# Altium PCB MAGI'sDIPBoard.PcbDoc
Units mm, origin at the board's own origin, x right, y up, seen from the top; angles counter-clockwise.
Board outline 152.4 x 101.6 mm, 2 copper layers (Top Layer, Bottom Layer); 2 components, 25 nets, 56 pads, 7 vias.
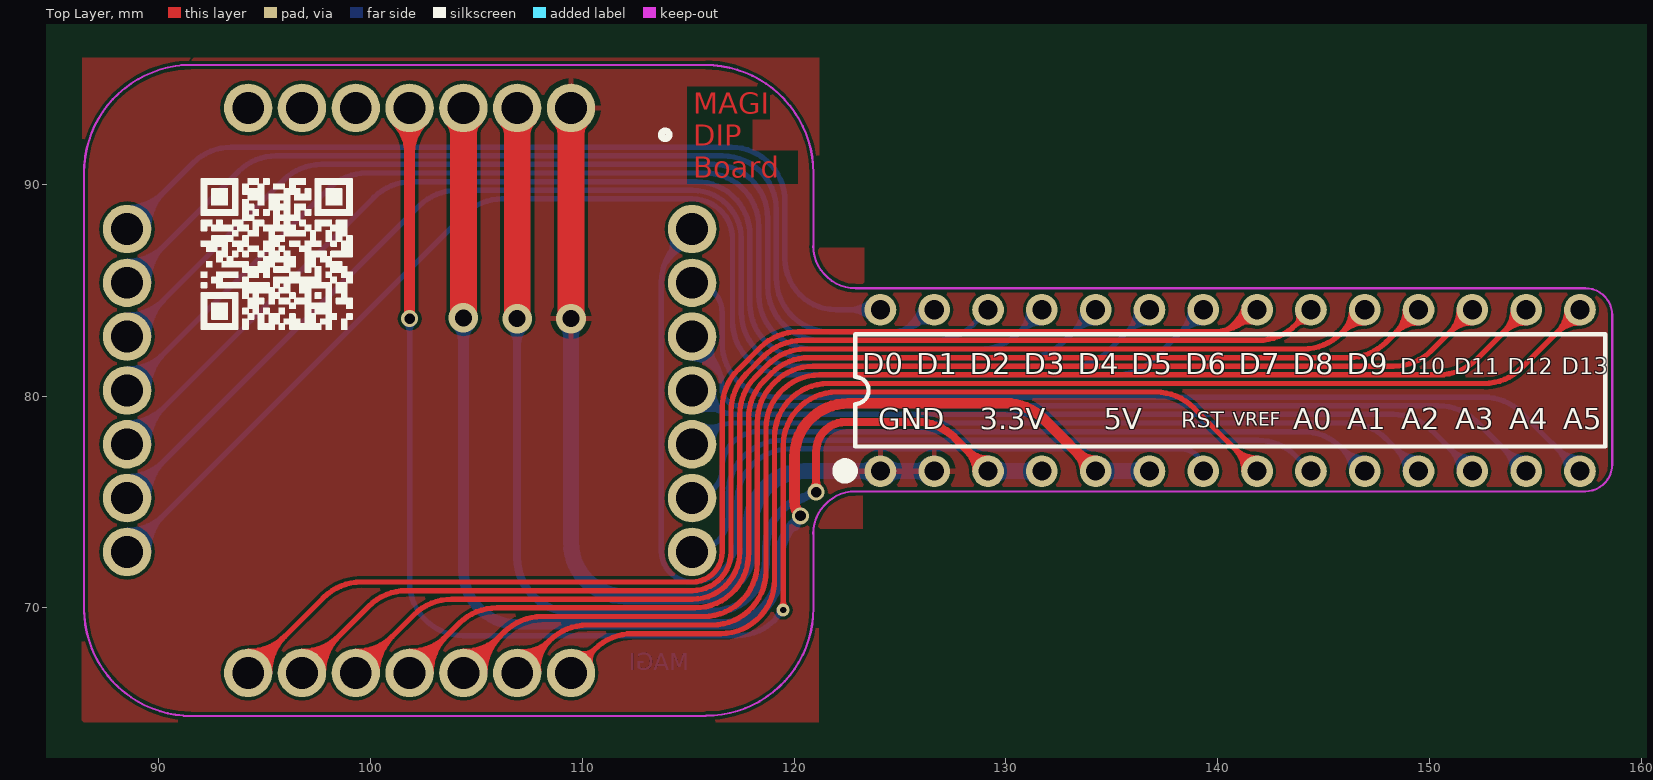
[diagram p0: Top Layer view]
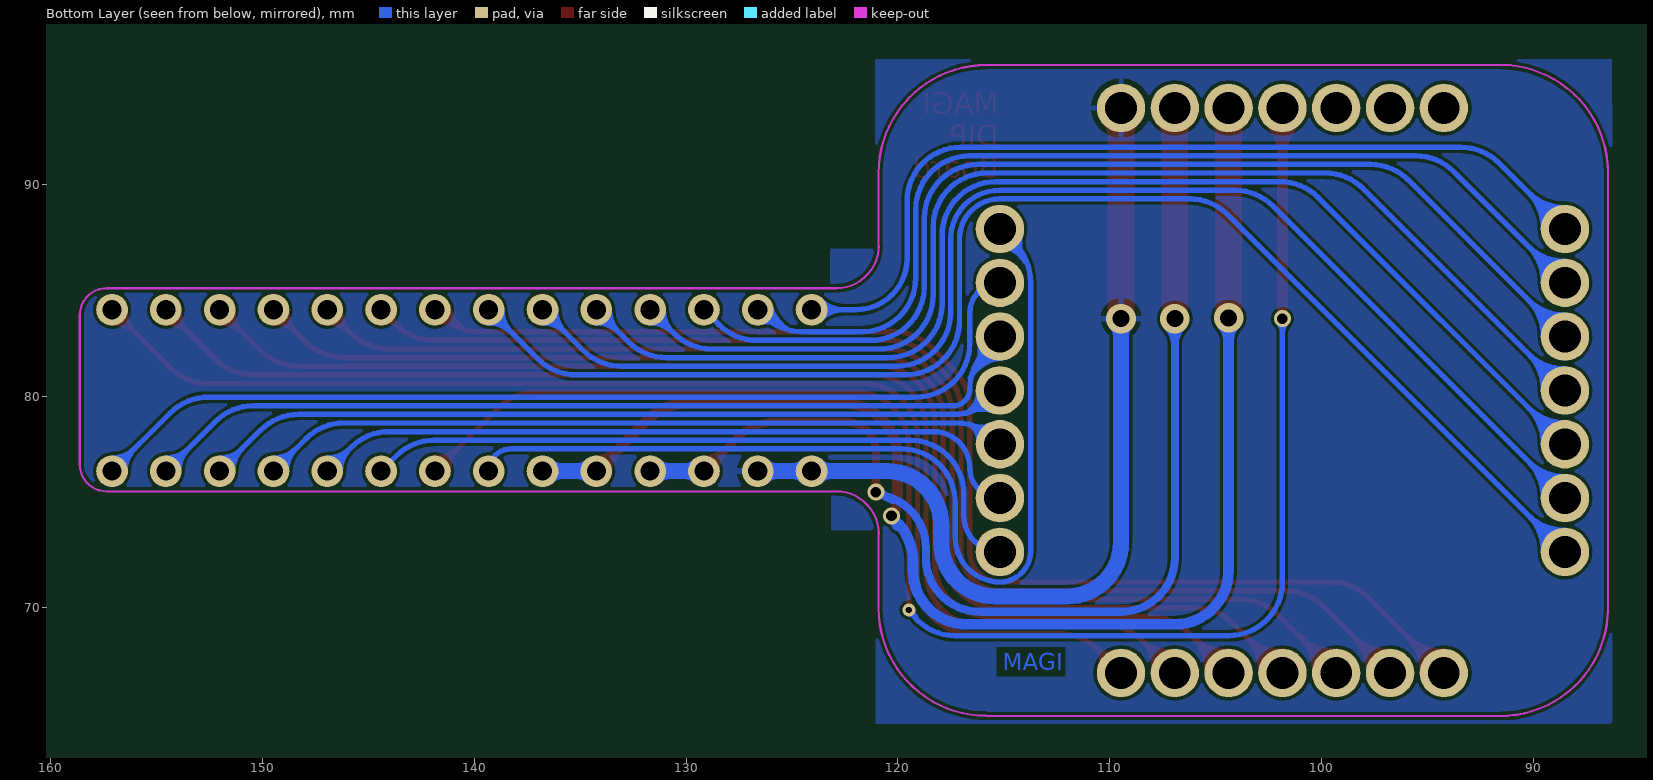
[diagram p1: Bottom Layer view, seen from below]

## Layer stack, top to bottom
Top Layer: signal copper 0.0356
Dielectric: dielectric 0.32, FR-4, Dk 4.8
Bottom Layer: signal copper 0.0356

## Board outline
25.4,25.4 177.8,25.4 177.8,127 25.4,127

## Design rules (kind name [scope] priority, off if disabled: settings)
Clearance [All] p1: gap=0.152
ComponentClearance [All] p1: gap=0 collisioncheckmode=3 verticalgap=0 showdistances=FALSE
PolygonConnect [All] p1: connectstyle=Relief reliefconductorwidth=0.254 reliefentries=4 polygonreliefangle="90 Angle" airgapwidth=0.254
RoutingVias [All] p1: holewidth=0.711 width=1.27 viastyle="Through Hole" minholewidth=0.305 minwidth=0.61 maxholewidth=25.4 maxwidth=127
SilkToSilkClearance [All] p1: silktosilkclearance=0
SolderMaskExpansion [All] p1: expansion=0.102
Width [All] p1: maxlimit=2.54 minlimit=0.152 preferedwidth=0.762
26 further rules are at their usual default settings.

## Classes and differential pairs
component class MAGI'sDIPBoard: ""

## Components (designator, comment, footprint, x,y, rotation, side; value= is the part's Value field where it differs from the comment)
J1 "MAGI-M8" MAGI-M8 101.854,80.264 r0 top
J2 "CON28" 28P3 140.589,80.264 r90 top

## Footprints (in the part's own frame and the unit in brackets; to place one, negate y for a bottom-side part, rotate by r counter-clockwise, add the part's x,y. Pads: shape width x height; smd on the part's side, far side on the other; paste and mask are expansions set on the pad)
28P3 [mm] "DIP, 28-Leads, Row Spacing 7.62mm, Pitch 2.54mm, Body 34.67x7.3mm"
  round 1.5 hole 0.9: 1(-3.81,16.51) 2(-3.81,13.97) 3(-3.81,11.43) 4(-3.81,8.89) 5(-3.81,6.35) 6(-3.81,3.81) 7(-3.81,1.27) 8(-3.81,-1.27) 9(-3.81,-3.81) 10(-3.81,-6.35) 11(-3.81,-8.89) 12(-3.81,-11.43) 13(-3.81,-13.97) 14(-3.81,-16.51) 15(3.81,-16.51) 16(3.81,-13.97) 17(3.81,-11.43) 18(3.81,-8.89) 19(3.81,-6.35) 20(3.81,-3.81) 21(3.81,-1.27) 22(3.81,1.27) 23(3.81,3.81) 24(3.81,6.35) 25(3.81,8.89) 26(3.81,11.43) 27(3.81,13.97) 28(3.81,16.51)
  silkscreen extent -4.1,-17.7 2.65,18.48, body extent -3.6,-17.65 3.6,17.65, height 4.58
MAGI-M8 [mil]
  round 90 hole 59.06: 1(300,525) 2(200,525) 3(100,525) 4(0,525) 5(-100,525) 6(-200,525) 7(-300,525) 8(-525,300) 9(-525,200) 10(-525,100) 11(-525,0) 12(-525,-100) 13(-525,-200) 14(-525,-300) 15(-300,-525) 16(-200,-525) 17(-100,-525) 18(0,-525) 19(100,-525) 20(200,-525) 21(300,-525) 22(525,-300) 23(525,-200) 24(525,-100) 25(525,0) 26(525,100) 27(525,200) 28(525,300)
  Keep-Out Layer lines w3.94: -605,-415 -605,290 -605,420 ; -605,-405 ccw(c-405,-405) -405,-605 ; -605,405 cw(c-405,405) -405,605 ; -425,605 425,605 ; -410,-605 415,-605
  silkscreen extent 468,468 482,482

## Part data
J2: "Connector"

## Via types
v1: diameter 0.8, hole 0.5, Top Layer to Bottom Layer, 3 vias
v2: diameter 1.4, hole 0.8, Top Layer to Bottom Layer, 3 vias
v3: diameter 0.61, hole 0.305, Top Layer to Bottom Layer, 1 vias

## Nets (pads, with @x,y where several pads share a name; then routed paths per layer and width w, separated by ;. In a path a pad name is that pad's centre, name@x,y a point inside that pad or via, vN(x,y) a via of type N, cw(c..) or ccw(c..) an arc to the next point about the centre after c; other vN are vias at no path point)
3.3V: J1.2 J2.3 J2.4 | length 64.9
  Top Layer w0.381: v1@120.896,75.612 ccw(c120.538,75.969) 121.044,75.969 ccw(c121.549,75.969) v1@121.192,75.612 ; v1(121.044,75.463) 121.044,77.381 cw(c122.441,77.381) 122.441,78.778 125.783,78.778 cw(c125.783,76.238) 127.579,78.034 J2.3 ; J2.3@128.6,76.454 ccw(c127.249,76.454) 128.204,77.409 ccw(c129.159,78.364) J2.3@129.159,77.013
  Top Layer w1.27: J1.2@106.575,93.24 cw(c105.708,92.373) 106.934,92.373 cw(c108.16,92.373) J1.2@107.293,93.24 ; v2(106.934,83.655) J1.2
  Bottom Layer w0.381: v2@106.574,83.295 cw(c105.704,82.425) 106.934,82.425 cw(c108.164,82.425) v2@107.294,83.295 ; v2(106.934,83.655) 106.934,72.359 ccw(c109.474,72.359) 109.474,69.819 116.141,69.819 ccw(c116.141,72.359) 118.681,72.359 118.681,72.821 cw(c121.221,72.821) v1@121.221,75.361 ; 120.255,75.102 ccw(c119.996,76.068) v1@120.862,75.568
  Bottom Layer w0.762: J2.3 J2.4 ; J2.3@129.42,76.193 cw(c130.05,75.563) 130.05,76.454 cw(c130.05,77.345) J2.3@129.42,76.715 ; J2.4@131.438,76.193 ccw(c130.808,75.563) 130.808,76.454 ccw(c130.808,77.345) J2.4@131.438,76.715
5V: J1.3 J2.5 J2.6 | length 73.6
  Top Layer w0.508: v1(120.307,74.346) cw(c120.997,75.035) 120.021,75.035 120.021,77.114 cw(c122.561,77.114) 122.561,79.654 129.986,79.654 cw(c129.986,77.114) 131.783,78.91 J2.5 ; J2.5@133.743,76.454 ccw(c132.546,76.454) 133.392,77.301 ccw(c134.239,78.147) J2.5@134.239,76.95
  Top Layer w1.27: J1.3@104.035,93.24 cw(c103.168,92.373) 104.394,92.373 cw(c105.62,92.373) J1.3@104.753,93.24 ; v2(104.394,83.693) J1.3
  Bottom Layer w0.508: v2@104.079,83.378 cw(c103.317,82.616) 104.394,82.616 cw(c105.471,82.616) v2@104.709,83.378 ; v2(104.394,83.693) 104.394,71.762 ccw(c106.934,71.762) 106.934,69.222 116.754,69.222 ccw(c116.754,71.762) 119.294,71.762 119.294,72.224 cw(c121.834,72.224) v1@120.377,74.305 ; 120.018,73.877 ccw(c119.54,74.279) v1@120.162,74.333
  Bottom Layer w0.762: J2.5 J2.6 ; J2.5@134.5,76.193 cw(c135.13,75.563) 135.13,76.454 cw(c135.13,77.345) J2.5@134.5,76.715 ; J2.6@136.518,76.193 ccw(c135.888,75.563) 135.888,76.454 ccw(c135.888,77.345) J2.6@136.518,76.715
A0: J1.22 J2.9 | length 33.2
  Bottom Layer w0.254: J1.22 ccw(c115.189,74.346) 116.891,74.346 116.891,75.374 cw(c119.431,75.374) 119.431,77.915 141.886,77.915 cw(c141.886,75.374) 143.682,77.171 J2.9
A1: J1.23 J2.10 | length 38
  Bottom Layer w0.254: J1.23 ccw(c115.189,76.606) 116.611,76.606 cw(c118.326,76.606) 118.326,78.321 144.02,78.321 cw(c144.02,75.781) 145.816,77.577 J2.10 ; J2.10@146.316,76.454 ccw(c144.812,76.454) 145.875,77.518 ccw(c146.939,78.581) J2.10@146.939,77.077 ; J2.10@146.57,76.454 ccw(c145.679,76.454) 146.309,77.084 ccw(c146.939,77.714) J2.10@146.939,76.823
A2: J1.24 J2.11 | length 42.8
  Bottom Layer w0.254: J1.24 115.448,77.983 cw(c117.244,76.187) 117.244,78.727 146.154,78.727 cw(c146.154,76.187) 147.95,77.983 J2.11 ; J1.24@115.526,78.408 ccw(c115.853,79.071) 116.223,78.43 ; J1.24@115.638,78.635 ccw(c116.106,79.584) 116.634,78.668 ccw(c117.073,77.909) J1.24@116.2,77.823 ; J1.24@115.947,77.798 cw(c116.642,77.866) 116.293,78.471 ; J2.11@148.856,76.454 ccw(c147.352,76.454) 148.415,77.518 ccw(c149.479,78.581) J2.11@149.479,77.077 ; J2.11@149.11,76.454 ccw(c148.219,76.454) 148.849,77.084 ccw(c149.479,77.714) J2.11@149.479,76.823
A3: J1.25 J2.12 | length 46.4
  Bottom Layer w0.254: J1.25 115.575,79.878 ccw(c117.371,81.674) 117.371,79.134 148.287,79.134 cw(c148.287,76.594) 150.083,78.39 J2.12 ; J1.25@115.436,79.543 cw(c115.776,78.549) 116.301,79.459 ; J1.25@115.518,79.303 cw(c116.016,77.848) 116.785,79.179 cw(c117.366,80.186) J1.25@116.204,80.228 ; J1.25@115.951,80.237 ccw(c116.888,80.203) 116.419,79.391 ; J2.12@151.396,76.454 ccw(c149.892,76.454) 150.955,77.518 ccw(c152.019,78.581) J2.12@152.019,77.077 ; J2.12@151.65,76.454 ccw(c150.759,76.454) 151.389,77.084 ccw(c152.019,77.714) J2.12@152.019,76.823
A4: J1.26 J2.13 | length 52.8
  Bottom Layer w0.254: J1.26@115.116,81.791 cw(c114.981,79.93) 116.596,80.863 ; J1.26@115.134,82.044 cw(c115.023,80.508) 116.357,81.278 ; J1.26@115.152,82.297 cw(c115.065,81.085) 116.117,81.693 ; J1.26 115.867,82.126 cw(c114.071,80.329) 116.611,80.329 ccw(c117.401,80.329) 117.401,79.54 150.421,79.54 cw(c150.421,77) 152.217,78.796 J2.13 ; J1.26@115.925,82.607 ccw(c116.883,82.35) 116.024,81.854 ; J1.26@116.17,82.541 ccw(c117.721,82.126) 116.331,81.323 ; J2.13@153.936,76.454 ccw(c152.432,76.454) 153.495,77.518 ccw(c154.559,78.581) J2.13@154.559,77.077 ; J2.13@154.19,76.454 ccw(c153.299,76.454) 153.929,77.084 ccw(c154.559,77.714) J2.13@154.559,76.823
A5: J1.27 J2.14 | length 50.7
  Bottom Layer w0.254: J1.27 cw(c115.189,83.922) 116.611,83.922 116.611,82.486 ccw(c119.151,82.486) 119.151,79.947 152.554,79.947 cw(c152.554,77.406) 154.35,79.203 J2.14 ; J2.14@156.476,76.454 ccw(c154.972,76.454) 156.035,77.518 ccw(c157.099,78.581) J2.14@157.099,77.077 ; J2.14@156.73,76.454 ccw(c155.839,76.454) 156.469,77.084 ccw(c157.099,77.714) J2.14@157.099,76.823
D0: J1.8 J2.28 | length 55
  Bottom Layer w0.254: J1.8 91.636,91.001 cw(c93.432,89.205) 93.432,91.745 117.03,91.745 cw(c117.03,89.205) 119.57,89.205 119.57,86.487 ccw(c121.983,86.487) 121.983,84.074 J2.28 ; J1.8@88.519,88.392 ccw(c88.519,89.618) 89.386,88.751 ccw(c90.253,87.884) J1.8@89.027,87.884 ; J1.8@88.519,88.646 ccw(c88.519,90.486) 89.82,89.185 ccw(c91.121,87.884) J1.8@89.281,87.884 ; J1.8@88.519,88.9 ccw(c88.519,91.353) 90.253,89.618 ccw(c91.988,87.884) J1.8@89.535,87.884 ; J2.28@123.638,83.633 ccw(c122.575,82.57) 122.575,84.074 ccw(c122.575,85.578) J2.28@123.638,84.515 ; J2.28@123.818,83.813 ccw(c123.188,83.183) 123.188,84.074 ccw(c123.188,84.965) J2.28@123.818,84.335
D1: J1.9 J2.27 | length 58.9
  Bottom Layer w0.254: J1.9 93.769,90.594 cw(c95.566,88.798) 95.566,91.338 116.624,91.338 cw(c116.624,88.798) 119.164,88.798 119.164,85.573 ccw(c121.704,85.573) 121.704,83.033 124.525,83.033 ccw(c124.525,85.573) 126.322,83.777 J2.27 ; J1.9@88.519,85.852 ccw(c88.519,87.078) 89.386,86.211 ccw(c90.253,85.344) J1.9@89.027,85.344 ; J1.9@88.519,86.106 ccw(c88.519,87.946) 89.82,86.645 ccw(c91.121,85.344) J1.9@89.281,85.344 ; J1.9@88.519,86.36 ccw(c88.519,88.813) 90.253,87.078 ccw(c91.988,85.344) J1.9@89.535,85.344 ; 125.143,83.096 ccw(c124.205,84.721) J2.27@126.017,84.235 ; 125.599,83.359 cw(c126.165,82.378) J2.27@126.458,83.472 ; 125.674,83.403 ccw(c125.043,84.496) J2.27@126.263,84.17
D2: J1.10 J2.26 | length 59.2
  Bottom Layer w0.254: J1.10 95.903,90.188 cw(c97.699,88.392) 97.699,90.932 116.218,90.932 cw(c116.218,88.392) 118.758,88.392 118.758,85.166 ccw(c121.298,85.166) 121.298,82.626 126.659,82.626 ccw(c126.659,85.166) 128.455,83.37 J2.26 ; J1.10@88.519,83.312 ccw(c88.519,84.538) 89.386,83.671 ccw(c90.253,82.804) J1.10@89.027,82.804 ; J1.10@88.519,83.566 ccw(c88.519,85.406) 89.82,84.105 ccw(c91.121,82.804) J1.10@89.281,82.804 ; J1.10@88.519,83.82 ccw(c88.519,86.273) 90.253,84.538 ccw(c91.988,82.804) J1.10@89.535,82.804
D3: J1.11 J2.25 | length 66.5
  Bottom Layer w0.254: J1.11 98.037,89.782 cw(c99.833,87.986) 99.833,90.526 115.799,90.526 cw(c115.799,87.986) 118.339,87.986 118.339,84.76 ccw(c120.879,84.76) 120.879,82.22 128.793,82.22 ccw(c128.793,84.76) 130.589,82.964 J2.25 ; J1.11@88.519,80.772 ccw(c88.519,81.998) 89.386,81.131 ccw(c90.253,80.264) J1.11@89.027,80.264 ; J1.11@88.519,81.026 ccw(c88.519,82.866) 89.82,81.565 ccw(c91.121,80.264) J1.11@89.281,80.264 ; J1.11@88.519,81.28 ccw(c88.519,83.733) 90.253,81.998 ccw(c91.988,80.264) J1.11@89.535,80.264 ; J2.25@131.076,84.074 cw(c129.572,84.074) 130.635,83.01 cw(c131.699,81.947) J2.25@131.699,83.451 ; J2.25@131.33,84.074 cw(c130.439,84.074) 131.069,83.444 cw(c131.699,82.814) J2.25@131.699,83.705
D4: J1.12 J2.24 | length 70.1
  Bottom Layer w0.254: J1.12 100.17,89.375 cw(c101.966,87.579) 101.966,90.119 115.379,90.119 cw(c115.379,87.579) 117.919,87.579 117.919,84.353 ccw(c120.459,84.353) 120.459,81.813 130.926,81.813 ccw(c130.926,84.353) 132.722,82.557 J2.24 ; J1.12@88.519,78.232 ccw(c88.519,79.458) 89.386,78.591 ccw(c90.253,77.724) J1.12@89.027,77.724 ; J1.12@88.519,78.486 ccw(c88.519,80.326) 89.82,79.025 ccw(c91.121,77.724) J1.12@89.281,77.724 ; J1.12@88.519,78.74 ccw(c88.519,81.193) 90.253,79.458 ccw(c91.988,77.724) J1.12@89.535,77.724 ; J2.24@133.616,84.074 cw(c132.112,84.074) 133.175,83.01 cw(c134.239,81.947) J2.24@134.239,83.451 ; J2.24@133.87,84.074 cw(c132.979,84.074) 133.609,83.444 cw(c134.239,82.814) J2.24@134.239,83.705
D5: J1.13 J2.23 | length 73.8
  Bottom Layer w0.254: J1.13 102.304,88.969 cw(c104.1,87.173) 104.1,89.713 115.21,89.713 cw(c115.21,87.409) 117.513,87.409 117.513,83.947 ccw(c120.053,83.947) 120.053,81.407 133.06,81.407 ccw(c133.06,83.947) 134.856,82.151 J2.23 ; J1.13@88.519,75.692 ccw(c88.519,76.918) 89.386,76.051 ccw(c90.253,75.184) J1.13@89.027,75.184 ; J1.13@88.519,75.946 ccw(c88.519,77.786) 89.82,76.485 ccw(c91.121,75.184) J1.13@89.281,75.184 ; J1.13@88.519,76.2 ccw(c88.519,78.653) 90.253,76.918 ccw(c91.988,75.184) J1.13@89.535,75.184 ; J2.23@136.156,84.074 cw(c134.652,84.074) 135.715,83.01 cw(c136.779,81.947) J2.23@136.779,83.451 ; J2.23@136.41,84.074 cw(c135.519,84.074) 136.149,83.444 cw(c136.779,82.814) J2.23@136.779,83.705
D6: J1.14 J2.22 | length 77.6
  Bottom Layer w0.254: J1.14 104.437,88.562 cw(c106.234,86.766) 106.234,89.306 115.202,89.306 cw(c115.202,87.411) 117.097,87.411 117.097,83.541 ccw(c119.637,83.541) 119.637,81.001 135.193,81.001 ccw(c135.193,83.541) 136.99,81.745 J2.22 ; J1.14@88.519,73.152 ccw(c88.519,74.378) 89.386,73.511 ccw(c90.253,72.644) J1.14@89.027,72.644 ; J1.14@88.519,73.406 ccw(c88.519,75.246) 89.82,73.945 ccw(c91.121,72.644) J1.14@89.281,72.644 ; J1.14@88.519,73.66 ccw(c88.519,76.113) 90.253,74.378 ccw(c91.988,72.644) J1.14@89.535,72.644 ; J2.22@138.696,84.074 cw(c137.192,84.074) 138.255,83.01 cw(c139.319,81.947) J2.22@139.319,83.451 ; J2.22@138.95,84.074 cw(c138.059,84.074) 138.689,83.444 cw(c139.319,82.814) J2.22@139.319,83.705
D7: J1.15 J2.21 | length 71.1
  Top Layer w0.254: J1.15 97.783,70.478 cw(c99.579,68.682) 99.579,71.222 115.189,71.222 ccw(c115.189,72.644) 116.611,72.644 116.611,79.44 cw(c119.151,79.44) 117.355,81.237 118.407,82.289 cw(c120.204,80.493) 120.204,83.033 139.765,83.033 ccw(c139.765,85.573) 141.562,83.777 J2.21 ; J1.15@94.234,67.437 ccw(c94.234,68.663) 95.101,67.796 ccw(c95.968,66.929) J1.15@94.742,66.929 ; J1.15@94.234,67.691 ccw(c94.234,69.531) 95.535,68.23 ccw(c96.836,66.929) J1.15@94.996,66.929 ; J1.15@94.234,67.945 ccw(c94.234,70.398) 95.968,68.663 ccw(c97.703,66.929) J1.15@95.25,66.929 ; 140.383,83.096 ccw(c139.445,84.721) J2.21@141.257,84.235 ; 140.839,83.359 cw(c141.405,82.378) J2.21@141.698,83.472 ; 140.914,83.403 ccw(c140.283,84.496) J2.21@141.503,84.17
D8: J1.16 J2.20 | length 68.8
  Top Layer w0.254: J1.16 99.916,70.071 cw(c101.712,68.275) 101.712,70.815 115.197,70.815 ccw(c115.197,72.644) 117.026,72.644 117.026,79.269 cw(c119.566,79.269) 117.77,81.065 118.587,81.882 cw(c120.383,80.086) 120.383,82.626 141.899,82.626 ccw(c141.899,85.166) 143.695,83.37 ; J1.16@96.774,67.437 ccw(c96.774,68.663) 97.641,67.796 ccw(c98.508,66.929) J1.16@97.282,66.929 ; J1.16@96.774,67.691 ccw(c96.774,69.531) 98.075,68.23 ccw(c99.376,66.929) J1.16@97.536,66.929 ; J1.16@96.774,67.945 ccw(c96.774,70.398) 98.508,68.663 ccw(c100.243,66.929) J1.16@97.79,66.929 ; J2.20@143.81,83.87 cw(c143.353,83.712) 143.695,83.37 ; J2.20@144.195,83.485 ccw(c144.037,83.028) 143.695,83.37 ; J2.20 143.695,83.37
D9: J1.17 J2.19 | length 71.5
  Top Layer w0.254: J1.17 102.05,69.665 cw(c103.846,67.869) 103.846,70.409 115.205,70.409 ccw(c115.205,72.644) 117.44,72.644 117.44,79.108 cw(c119.98,79.108) 118.184,80.905 118.755,81.476 cw(c120.551,79.68) 120.551,82.22 144.033,82.22 ccw(c144.033,84.76) 145.829,82.964 J2.19 ; J1.17@99.314,67.437 ccw(c99.314,68.663) 100.181,67.796 ccw(c101.048,66.929) J1.17@99.822,66.929 ; J1.17@99.314,67.691 ccw(c99.314,69.531) 100.615,68.23 ccw(c101.916,66.929) J1.17@100.076,66.929 ; J1.17@99.314,67.945 ccw(c99.314,70.398) 101.048,68.663 ccw(c102.783,66.929) J1.17@100.33,66.929 ; J2.19@146.316,84.074 cw(c144.812,84.074) 145.875,83.01 cw(c146.939,81.947) J2.19@146.939,83.451 ; J2.19@146.57,84.074 cw(c145.679,84.074) 146.309,83.444 cw(c146.939,82.814) J2.19@146.939,83.705
D10: J1.18 J2.18 | length 71.5
  Top Layer w0.254: J1.18 104.183,69.258 cw(c105.98,67.462) 105.98,70.002 115.314,70.002 ccw(c115.314,72.542) 117.854,72.542 117.854,78.944 cw(c120.394,78.944) 118.598,80.74 118.928,81.069 cw(c120.724,79.273) 120.724,81.813 146.166,81.813 ccw(c146.166,84.353) 147.962,82.557 J2.18 ; J1.18@101.854,67.437 ccw(c101.854,68.663) 102.721,67.796 ccw(c103.588,66.929) J1.18@102.362,66.929 ; J1.18@101.854,67.691 ccw(c101.854,69.531) 103.155,68.23 ccw(c104.456,66.929) J1.18@102.616,66.929 ; J1.18@101.854,67.945 ccw(c101.854,70.398) 103.588,68.663 ccw(c105.323,66.929) J1.18@102.87,66.929 ; J2.18@148.856,84.074 cw(c147.352,84.074) 148.415,83.01 cw(c149.479,81.947) J2.18@149.479,83.451 ; J2.18@149.11,84.074 cw(c148.219,84.074) 148.849,83.444 cw(c149.479,82.814) J2.18@149.479,83.705
D11: J1.19 J2.17 | length 71.6
  Top Layer w0.254: J1.19 106.317,68.852 cw(c108.113,67.056) 108.113,69.596 115.729,69.596 ccw(c115.729,72.136) 118.269,72.136 118.269,78.774 cw(c120.809,78.774) 119.013,80.57 119.106,80.663 cw(c120.902,78.867) 120.902,81.407 148.3,81.407 ccw(c148.3,83.947) 150.096,82.151 J2.17 ; J1.19@104.394,67.437 ccw(c104.394,68.663) 105.261,67.796 ccw(c106.128,66.929) J1.19@104.902,66.929 ; J1.19@104.394,67.691 ccw(c104.394,69.531) 105.695,68.23 ccw(c106.996,66.929) J1.19@105.156,66.929 ; J1.19@104.394,67.945 ccw(c104.394,70.398) 106.128,68.663 ccw(c107.863,66.929) J1.19@105.41,66.929 ; J2.17@151.396,84.074 cw(c149.892,84.074) 150.955,83.01 cw(c152.019,81.947) J2.17@152.019,83.451 ; J2.17@151.65,84.074 cw(c150.759,84.074) 151.389,83.444 cw(c152.019,82.814) J2.17@152.019,83.705
D12: J1.20 J2.16 | length 68.4
  Top Layer w0.254: J1.20 108.451,68.446 ; J1.20@107.01,67.687 ccw(c107.14,68.998) 108.071,68.066 ccw(c109.003,67.135) J1.20@107.692,67.005 ; J1.20@107.035,67.94 ccw(c107.209,69.687) 108.451,68.446 ; J1.20@107.945,67.03 cw(c109.692,67.204) 108.451,68.446 ; J2.16@153.936,84.074 cw(c152.432,84.074) 153.495,83.01 cw(c154.559,81.947) J2.16@154.559,83.451 ; J2.16@154.19,84.074 cw(c153.299,84.074) 153.929,83.444 cw(c154.559,82.814) J2.16@154.559,83.705 ; J2.16 152.23,81.745 cw(c150.433,83.541) 150.433,81.001 121.215,81.001 ccw(c121.215,78.461) 118.675,78.461 118.675,71.73 cw(c116.135,71.73) 116.135,69.19 110.247,69.19 ccw(c110.247,66.65) 108.451,68.446
D13: J1.21 J2.15 | length 65.8
  Top Layer w0.254: J1.21 110.584,68.039 ; J1.21@109.745,67.641 ccw(c109.933,68.136) 110.307,67.762 ccw(c110.681,67.388) J1.21@110.186,67.2 ; J1.21@109.835,67.879 ccw(c110.086,68.538) 110.584,68.039 ; J1.21@110.424,67.29 cw(c111.083,67.541) 110.584,68.039 ; J2.15@156.476,84.074 cw(c154.972,84.074) 156.035,83.01 cw(c157.099,81.947) J2.15@157.099,83.451 ; J2.15@156.73,84.074 cw(c155.839,84.074) 156.469,83.444 cw(c157.099,82.814) J2.15@157.099,83.705 ; J2.15 154.363,81.338 cw(c152.567,83.134) 152.567,80.594 121.622,80.594 ccw(c121.622,78.054) 119.082,78.054 119.082,71.323 cw(c116.542,71.323) 116.542,68.783 112.38,68.783 ccw(c112.38,66.243) 110.584,68.039
GND: J1.1 J2.1 J2.2 | length 50.2
  Top Layer w1.27: J1.1@109.115,93.24 cw(c108.248,92.373) 109.474,92.373 cw(c110.7,92.373) J1.1@109.833,93.24 ; v2(109.474,83.655) J1.1
  Bottom Layer w0.762: v2@109.248,83.429 cw(c108.704,82.885) 109.474,82.885 cw(c110.244,82.885) v2@109.7,83.429 ; v2(109.474,83.655) 109.474,73.083 ccw(c112.014,73.083) 112.014,70.543 115.418,70.543 ccw(c115.418,73.083) 117.958,73.083 117.958,73.914 cw(c120.498,73.914) 120.498,76.454 J2.1 J2.2 ; J2.1@123.818,76.193 ccw(c123.188,75.563) 123.188,76.454 ccw(c123.188,77.345) J2.1@123.818,76.715 ; J2.1@124.34,76.193 cw(c124.97,75.563) 124.97,76.454 cw(c124.97,77.345) J2.1@124.34,76.715 ; J2.2@126.358,76.193 ccw(c125.728,75.563) 125.728,76.454 ccw(c125.728,77.345) J2.2@126.358,76.715
RST: J1.28 J2.7 | length 51.8
  Bottom Layer w0.254: 113.995,86.332 cw(c115.377,85.534) J1.28@115.25,87.124 ; 114.05,86.427 ccw(c112.688,87.214) J1.28@114.208,87.621 ; 114.237,86.75 cw(c115.33,86.119) J1.28@115.23,87.378 ; 114.357,86.958 ccw(c113.526,87.438) J1.28@114.453,87.687 ; J1.28 114.485,87.18 ccw(c116.281,85.384) 113.741,85.384 113.741,72.669 ccw(c115.189,72.669) 115.189,71.222 ccw(c115.189,73.33) 117.297,73.33 117.297,74.968 cw(c119.837,74.968) 119.837,77.508 138.265,77.508 cw(c138.265,76.454) J2.7
VREF: J1.4 J2.8 | length 84.2
  Top Layer w0.254: v3@119.362,70.027 ccw(c119.059,70.33) 119.488,70.33 ccw(c119.917,70.33) v3@119.614,70.027 ; v3(119.488,69.901) 119.488,77.648 cw(c122.028,77.648) 122.028,80.188 137.073,80.188 cw(c137.073,77.648) 138.869,79.444 J2.8 ; J2.8@141.236,76.454 ccw(c139.732,76.454) 140.795,77.518 ccw(c141.859,78.581) J2.8@141.859,77.077 ; J2.8@141.49,76.454 ccw(c140.599,76.454) 141.229,77.084 ccw(c141.859,77.714) J2.8@141.859,76.823
  Top Layer w0.508: J1.4@101.225,92.97 cw(c99.708,91.453) 101.854,91.453 cw(c104,91.453) J1.4@102.483,92.97 ; v1(101.854,83.655) J1.4
  Bottom Layer w0.254: v1@101.661,83.462 cw(c101.195,82.996) 101.854,82.996 cw(c102.513,82.996) v1@102.047,83.462 ; v1(101.854,83.655) 101.854,71.229 ccw(c104.394,71.229) 104.394,68.689 117.297,68.689 ccw(c117.297,71.229) v3@119.378,69.772 ; 119.161,69.563 ccw(c118.824,69.914) v3@119.31,69.904 ; 119.219,69.619 cw(c119.477,69.351) v3@119.484,69.723
pads on no net: J1.5 J1.6 J1.7

## Polygon pours and split planes (outlines as drawn)
GND on Top Layer "Top Layer-No Net" (solid, pour order 2): 86.401,95.968 121.186,95.968 121.186,88.589 121.186,87.002 122.431,87.002 123.307,87.002 123.307,85.338 123.307,85.363 158.931,85.363 158.931,75.419 158.931,75.33 123.256,75.33 123.256,73.781 123.256,73.73 121.161,73.73 121.161,64.65 121.161,64.599 86.388,64.599
GND on Bottom Layer "Bottom" (solid, pour order 2): 86.298,95.908 121.083,95.908 121.083,88.53 121.083,86.942 122.327,86.942 123.204,86.942 123.204,85.278 123.204,85.304 158.827,85.304 158.827,75.36 158.827,75.271 123.153,75.271 123.153,73.721 123.153,73.671 121.057,73.671 121.057,64.59 121.057,64.539 86.285,64.539

## Keep-outs
Keep-Out Layer:
  lines w0.1: 112.23,64.897 115.837,64.897 ; 112.649,95.631 115.817,95.631 ; 115.817,95.626 cw(c115.817,90.526) 120.917,90.526 120.917,87.09 ; 115.837,64.91 ccw(c115.837,69.99) 120.917,69.99 120.917,73.501 ; 120.911,73.501 cw(c122.911,73.501) 122.911,75.501 128.759,75.501 157.353,75.501 ccw(c157.353,76.772) 158.623,76.772 158.623,83.757 158.623,83.82 ccw(c157.353,83.82) 157.353,85.09 125.692,85.09 122.911,85.09 cw(c122.911,87.09) 120.911,87.09

## Other copper
Top Layer:
  text "MAGI" at 115.24,93.332 h1
  text "DIP" at 115.24,91.808 h1
  text "Board" at 115.24,90.297 h1

## Silkscreen, mask and mechanical layers (free items; w line width, h text height)
Top Overlay:
  drawing of 1991 lines, arcs and shapes, not listed
  text "D0" at 123.228,81.039 h1
  text "D1" at 125.767,81.039 h1
  text "D2" at 128.306,81.039 h1
  text "D3" at 130.845,81.039 h1
  text "D4" at 133.384,81.039 h1
  text "D5" at 135.923,81.039 h1
  text "D6" at 138.462,81.039 h1
  text "D7" at 141.001,81.039 h1
  text "D8" at 143.54,81.039 h1
  text "D9" at 146.079,81.039 h1
  text "D10" at 148.618,81.039 h0.76
  text "D11" at 151.157,81.039 h0.76
  text "D12" at 153.696,81.039 h0.76
  text "D13" at 156.235,81.039 h0.77
  text "VREF" at 140.716,78.588 h0.64
  text "RST" at 138.278,78.511 h0.76
  text "GND" at 123.977,78.422 h1
  text "3.3V" at 128.765,78.422 h1
  text "5V" at 134.62,78.422 h1
  text "A0" at 143.561,78.422 h1
  text "A1" at 146.108,78.422 h1
  text "A2" at 148.656,78.422 h1
  text "A3" at 151.204,78.422 h1
  text "A4" at 153.751,78.422 h1
  text "A5" at 156.299,78.422 h1
Top Solder:
  text "MAGI's Board" at 90.97,76.619 h2

## Text inside footprints (layer, text, board x,y; h text height)
J1: Bottom Layer "MAGI" at 115.062,67.056 h0.8